# Altium PCB ChassisPowerDistribution_B_2.0_RW.PcbDoc (part 1 of 2)
Units mil, origin at the board's own origin, x right, y up, seen from the top; angles counter-clockwise.
Board outline 15750 x 2250 mil, 4 copper layers (Top Layer, Mid Top Layer, Mid Bottom Layer, Bottom Layer), stack 23.756 mil thick; 164 components, 75 nets, 526 pads, 63 vias.
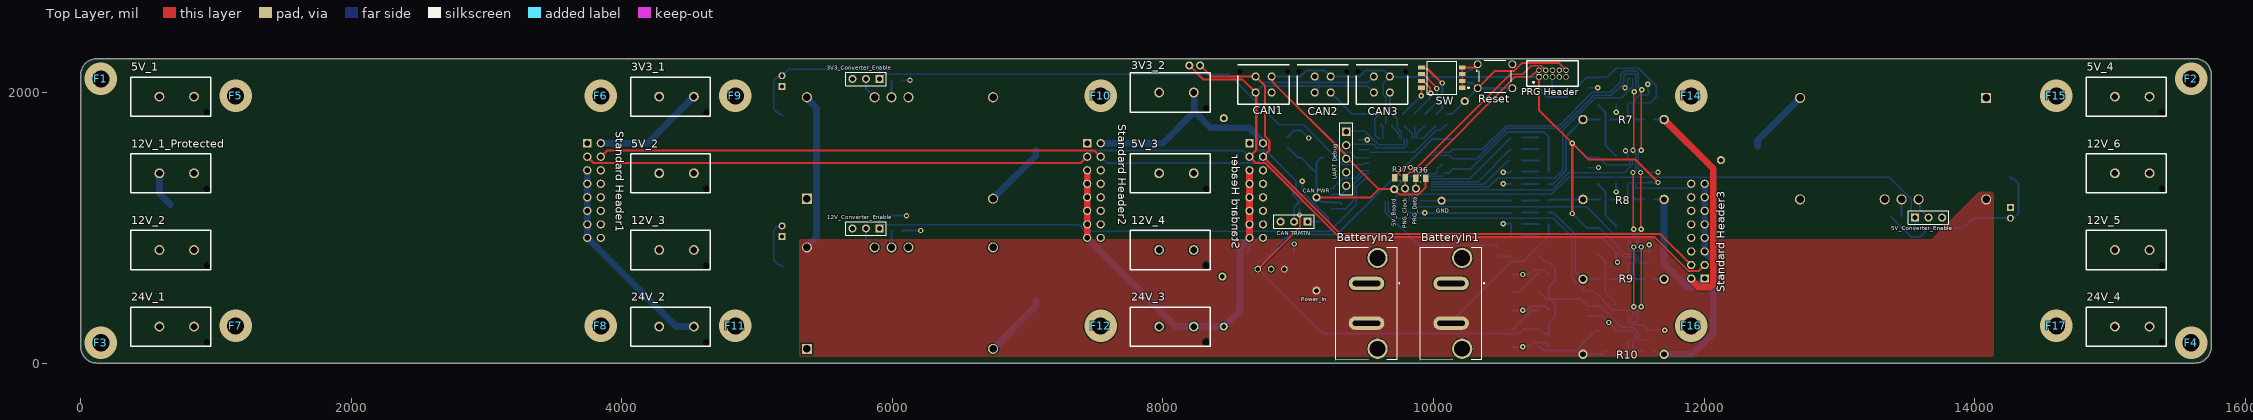
[diagram p0: Top Layer view]
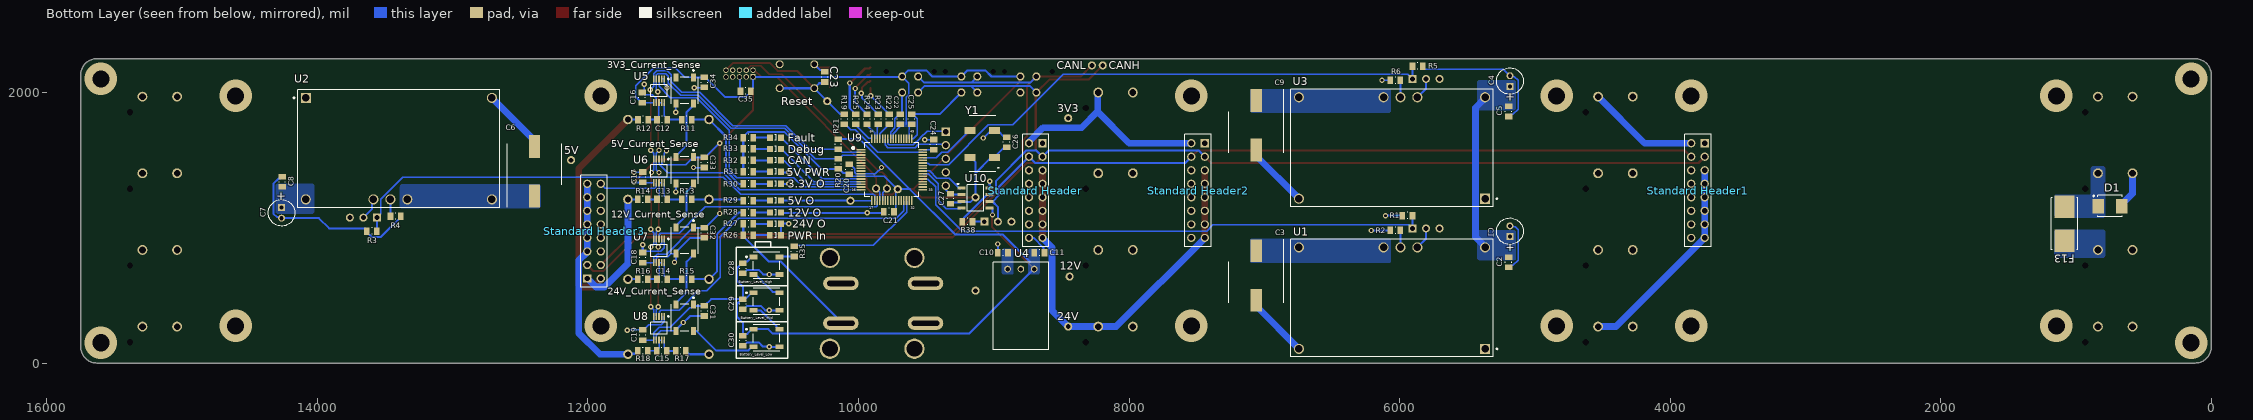
[diagram p1: Bottom Layer view, seen from below]
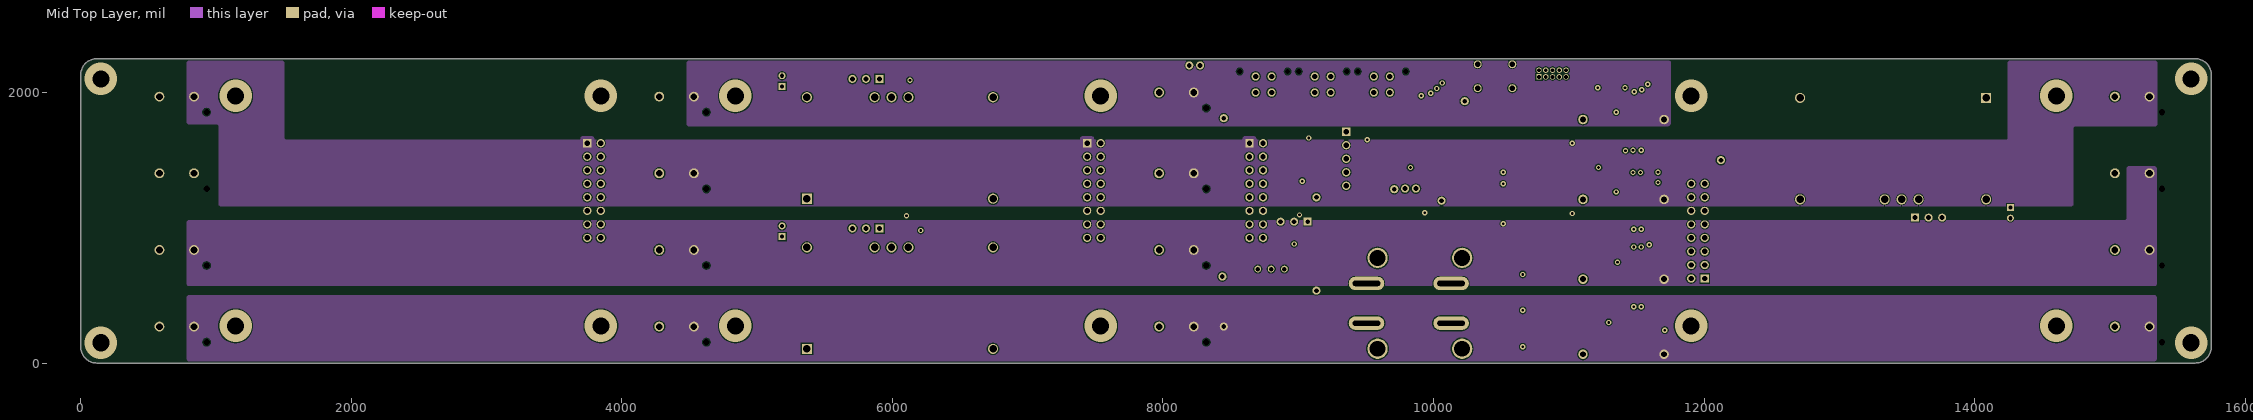
[diagram p2: Mid Top Layer]
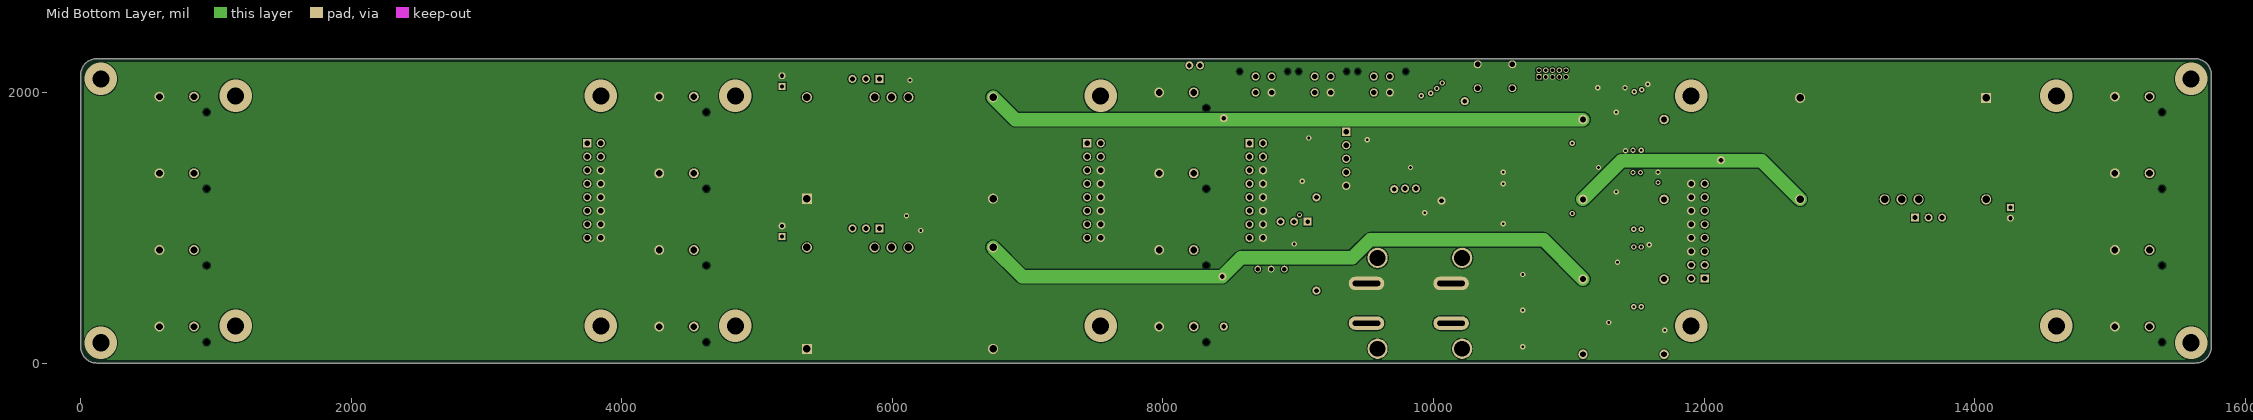
[diagram p3: Mid Bottom Layer]
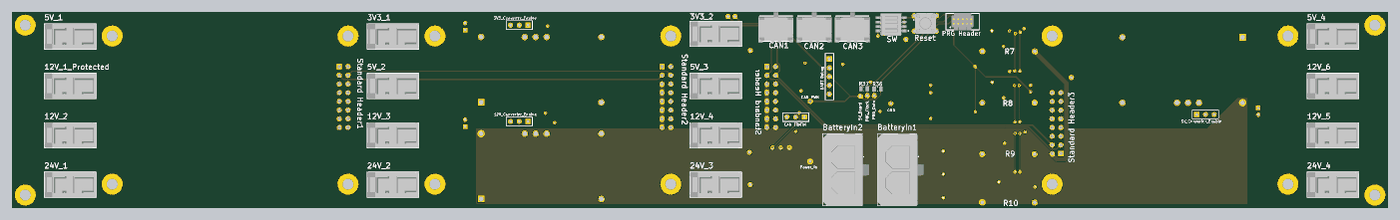
[diagram p5: 3D render of the assembled board from above, using the file's embedded part models]

## Layer stack, top to bottom
Top Solder: solder mask 0.4, Solder Resist, Dk 3.5
Top Layer: signal copper 1.4
Dielectric 2: prepreg 2.8, PP-006, Dk 4.1
Mid Top Layer: signal copper 1.378
Dielectric 1: dielectric 12.6, FR-4, Dk 4.8
Mid Bottom Layer: signal copper 1.378
Dielectric 3: prepreg 2.8, PP-006, Dk 4.1
Bottom Layer: signal copper 1.4
Bottom Solder: solder mask 0.4, Solder Resist, Dk 3.5

## Board outline
120,0 15630,0 ccw(c15630,120) 15750,120 15750,2130 ccw(c15630,2130) 15630,2250 120,2250 ccw(c119.98,2130.02) 0,2130 0,120 ccw(c119.99,119.99)

## Design rules (kind name [scope] priority, off if disabled: settings)
BoardOutlineClearance [All] p1: gap=7.87 ignorepadtopadclearanceinfootprint=FALSE except(15.75: Arc-SplitBarrior Arc-SplitContinuation Track-SplitBarrior Track-SplitContinuation SMDPad-SplitBarrior SMDPad-SplitContinuation THPad-SplitBarrior THPad-SplitContinuation Via-SplitBarrior Via-SplitContinuation Fill-SplitBarrior Fill-SplitContinuation Poly-SplitBarrior Poly-SplitContinuation Region-SplitBarrior Region-SplitContinuation Text-SplitBarrior Text-SplitContinuation)
Clearance "Clearance Bottom Layer" [OnLayer('Bottom Layer')] p1: gap=8 ignorepadtopadclearanceinfootprint=TRUE except(10: Arc-Text Track-Text SMDPad-Text THPad-Text Via-Text Fill-Text Poly-Text Region-Text Text-Text)
Clearance "Clearance Top Layer" [OnLayer('Top Layer')] p2: gap=8 ignorepadtopadclearanceinfootprint=TRUE except(10: Arc-Text Track-Text SMDPad-Text THPad-Text Via-Text Fill-Text Poly-Text Region-Text Text-Text)
Clearance [All] p3: gap=7.87 ignorepadtopadclearanceinfootprint=FALSE except(3.5: Arc-Arc Arc-Track Arc-SMDPad Track-Track Track-SMDPad SMDPad-SMDPad; 5: Arc-Via Track-Via SMDPad-Via THPad-Via Via-Via; 10: Arc-Text Track-Text SMDPad-Text THPad-Text Via-Text Fill-Text Poly-Text Region-Text Text-Text)
HoleSize [All] p1: absolutevalues=TRUE maxlimit=248.03 minlimit=7.87 maxpercent=80.000 minpercent=20.000
MinimumAnnularRing [All] p1: minimumring=3
MinimumSolderMaskSliver [All] p1: minsoldermaskwidth=3.94
PolygonConnect PolygonConnect_1 [All] p1: connectstyle=Direct reliefconductorwidth=20 reliefentries=4 polygonreliefangle="90 Angle" airgapwidth=10
RoutingCorners [All] p1: cornerstyle=Round minsetback=100 maxsetback=100
RoutingVias [All] p1: holewidth=19.68 width=39.37 viastyle="Through Hole" minholewidth=7.87 minwidth=17.72 maxholewidth=39.37 maxwidth=78.74
SilkToSilkClearance [All] p1: silktosilkclearance=3.94
SilkToSolderMaskClearance [IsPad] p1: minsilkscreentomaskgap=3.94 clearancetoexposedcopper=TRUE
SolderMaskExpansion [All] p1: expansion=4 istentingtop=FALSE
Width [All] p1: maxlimit=100 minlimit=3.5 preferedwidth=15
25 further rules are at their usual default settings.

## Classes and differential pairs
component class Microcontroller: C20 C21 C22 C23 C24 C25 C26 F1 F2 F3 F4 GND R19 R20 R21 Reset U9 Y1
component class LEDs: "3.3V O" 3V3_Current_Sense "5V O" "5V PWR" 5V_Current_Sense "12V O" 12V_Current_Sense "24V O" 24V_Current_Sense Battery_Level_High Battery_Level_Low Battery_Level_Mid C28 C29 C30 C31 C32 C33 C34 CAN Debug Fault "PWR In" R26 R27 R28 R29 R30 R31 R32 R33 R34 R35
component class "Current Sensors": C12 C13 C14 C15 C16 C17 C18 C19 R7 R8 R9 R10 R11 R12 R13 R14 R15 R16 R17 R18 U5 U6 U7 U8
component class Converters: 3V3 3V3_Converter_Enable 5V 5V_Board 5V_Converter_Enable 12V 12V_Converter_Enable C1 C2 C3 C4 C5 C6 C7 C8 C9 C10 C11 Power_In R1 R2 R3 R4 R5 R6 U1 U2 U3 U4
component class Connectors: 3V3_1 3V3_2 5V_1 5V_2 5V_3 5V_4 12V_1_Protected 12V_2 12V_3 12V_4 12V_5 12V_6 24V 24V_1 24V_2 24V_3 24V_4 BatteryIn1 BatteryIn2 C35 CAN1 CAN2 CAN3 "CAN TRMTN" CANH CANL D1 F5 F6 F7 F8 F9 F10 F11 F12 F13 F14 F15 F16 F17 PNG_Clock "PRG Header" PRG_Data R36 R37 R38 "Standard Header" "Standard Header1" "Standard Header2" "Standard Header3" "UART Debug"
component class CAN: C27 "CAN PWR" R22 R23 R24 R25 SW U10

## Components (designator, comment, footprint, x,y, rotation, side; value= is the part's Value field where it differs from the comment)
"3.3V O" "Yellow LED" 0805_A 10613.66,1325 r0 bottom
3V3 "Test Point" "Test Point Through-hole" 8425,1790 r90 bottom
3V3_1 "Molex 6.5MM  power connector" "power connector" 4045,2150 r270 top
3V3_2 "Molex 6.5MM  power connector" "power connector" 7740,2180.71 r270 top
3V3_Converter_Enable "Header 3" HDR1X3 5905,2100 r180 top
3V3_Current_Sense "RBG_LED" RGB_LED_1 11285.04,2015 r270 bottom
5V "Test Point" "Test Point Through-hole" 12100,1480 r90 bottom
"5V O" "Yellow LED" 0805_A 10613.66,1201.25 r0 bottom
"5V PWR" "Yellow LED" 0805_A 10613.66,1415 r0 bottom
5V_1 "Molex 6.5MM  power connector" "power connector" 350,2150 r270 top
5V_2 "Molex 6.5MM  power connector" "power connector" 4045,1583.33 r270 top
5V_3 "Molex 6.5MM  power connector" "power connector" 7740,1583.33 r270 top
5V_4 "Molex 6.5MM  power connector" "power connector" 14805,2150 r270 top
5V_Board "Test Point" "Test Point Through-hole" 9735,1265 r90 top
5V_Converter_Enable "Header 3" HDR1X3 13560,1075 r0 top
5V_Current_Sense "RBG_LED" RGB_LED_1 11285.04,1425 r270 bottom
12V "Test Point" "Test Point Through-hole" 8414.3,619.5 r90 bottom
"12V O" "Yellow LED" 0805_A 10613.66,1112.5 r0 bottom
12V_1_Protected "Molex 6.5MM  power connector" "power connector" 350,1583.33 r270 top
12V_2 "Molex 6.5MM  power connector" "power connector" 350,1016.67 r270 top
12V_3 "Molex 6.5MM  power connector" "power connector" 4045,1016.67 r270 top
12V_4 "Molex 6.5MM  power connector" "power connector" 7740,1016.67 r270 top
12V_5 "Molex 6.5MM  power connector" "power connector" 14805,1016.67 r270 top
12V_6 "Molex 6.5MM  power connector" "power connector" 14805,1583.33 r270 top
12V_Converter_Enable "Header 3" HDR1X3 5905,995 r180 top
12V_Current_Sense "RBG_LED" RGB_LED_1 11285.04,905 r270 bottom
24V "Test Point" "Test Point Through-hole" 8470,245 r180 bottom
"24V O" "Yellow LED" 0805_A 10613.66,1028.75 r0 bottom
24V_1 "Molex 6.5MM  power connector" "power connector" 350,450 r270 top
24V_2 "Molex 6.5MM  power connector" "power connector" 4045,450 r270 top
24V_3 "Molex 6.5MM  power connector" "power connector" 7740,450 r270 top
24V_4 "Molex 6.5MM  power connector" "power connector" 14805,450 r270 top
24V_Current_Sense "RBG_LED" RGB_LED_1 11285,335 r270 bottom
Battery_Level_High "RBG_LED" RGB_LED_1 10680,720 r180 bottom
Battery_Level_Low "RBG_LED" RGB_LED_1 10680,185 r180 bottom
Battery_Level_Mid "RBG_LED" RGB_LED_1 10680,455 r180 bottom
BatteryIn1 "Super Saber" "Super Sabre" 10329.71,35 r90 top
BatteryIn2 "Super Saber" "Super Sabre" 9704.71,35 r90 top
C1 "ECA1HM100" CAPPR55-200-1100X500X1200 5185,974.37 r90 bottom
C2 "Capacitor 0805" "Cap 0805" 5195,745 r90 bottom
C3 "Motor Capacitor SMD" CAP_SMD_CAN 7060,646.93 r270 bottom value="330 uF"
C4 "ECA1HM100" CAPPR55-200-1100X500X1200 5185,2084.37 r90 bottom
C5 "Capacitor 0805" "Cap 0805" 5195,1860 r90 bottom
C6 "Motor Capacitor SMD" CAP_SMD_CAN 12395,1418.07 r90 bottom value="330 uF"
C7 "ECA1HM100" CAPPR55-200-1100X500X1200 14265,1110.63 r270 bottom
C8 "Capacitor 0805" "Cap 0805" 14260,1340 r270 bottom
C9 "Motor Capacitor SMD" CAP_SMD_CAN 7060,1756.93 r270 bottom value="330 uF"
C10 "Capacitor 0805" "Cap 0805" 8932.6,815 r180 bottom
C11 "Capacitor 0805" "Cap 0805" 8662.4,815 r0 bottom
C12 "0805 Capacitor" "Cap 0805" 11452.6,1800 r0 bottom value=0.1µF
C13 "0805 Capacitor" "Cap 0805" 11452.6,1210 r0 bottom value=0.1µF
C14 "0805 Capacitor" "Cap 0805" 11452.6,620 r0 bottom value=0.1µF
C15 "0805 Capacitor" "Cap 0805" 11455,90 r0 bottom value=0.1µF
C16 "Capacitor 0805" "Cap 0805" 11600,1962.4 r270 bottom
C17 "Capacitor 0805" "Cap 0805" 11595,1375 r270 bottom
C18 "Capacitor 0805" "Cap 0805" 11595,780 r270 bottom
C19 "Capacitor 0805" "Cap 0805" 11595,207.4 r270 bottom
C20 "Capacitor 0805" "Cap 0805" 10070,1432.4 r90 bottom
C21 "Capacitor 0805" "Cap 0805" 9775,1120 r0 bottom
C22 "Capacitor 0805" "Cap 0805" 9690,1802.4 r90 bottom
C23 "0805 Capacitor" "Cap 0805" 10250,2115 r270 bottom value=0.1µF
C24 "Capacitor 0805" "Cap 0805" 9445,1615 r90 bottom
C25 "Capacitor 0805" "Cap 0805" 9607.5,1802.4 r90 bottom
C26 "Capacitor 0805" "Cap 0805" 8905,1632.4 r270 bottom
C27 "Capacitor 0805" "Cap 0805" 9320,1215 r90 bottom
C28 "0805 Capacitor" "Cap 0805" 10855,700 r270 bottom value=0.1µF
C29 "0805 Capacitor" "Cap 0805" 10855,435 r270 bottom value=0.1µF
C30 "0805 Capacitor" "Cap 0805" 10855,165 r270 bottom value=0.1µF
C31 "0805 Capacitor" "Cap 0805" 11140,385 r270 bottom value=0.1µF
C32 "0805 Capacitor" "Cap 0805" 11140,962.6 r270 bottom value=0.1µF
C33 "0805 Capacitor" "Cap 0805" 11140,1482.6 r270 bottom value=0.1µF
C34 "0805 Capacitor" "Cap 0805" 11140,2075 r270 bottom value=0.1µF
C35 "Capacitor 0805" "Cap 0805" 10835,2010 r180 bottom
CAN "Blue LED" 0805_A 10613.66,1498.75 r0 bottom
CAN1 "Molex Micro" "microfit 4 pin" 8744.06,2059.06 r180 top
CAN2 "Molex Micro" "microfit 4 pin" 9181.16,2059.06 r180 top
CAN3 "Molex Micro" "microfit 4 pin" 9618.27,2059.06 r180 top
"CAN PWR" "Test Point" "Test Point Through-hole" 9160,1205 r90 top
"CAN TRMTN" "Header 3" HDR1X3 9070,1045 r180 top
CANH "Test Point" "Test Point Through-hole" 8170,2180 r90 bottom
CANL "Test Point" "Test Point Through-hole" 8250,2180 r90 bottom
D1 "1SMB5928BT3G" ONSC-SMB-2-403A-03_H_V 750,1160 r180 bottom
Debug "Green LED" 0805_A 10613.66,1582.5 r0 bottom
F1 "Screw Hole" "Screw Hole" 150,2100 r0 top locked
F2 "Screw Hole" "Screw Hole" 15600,2100 r0 top locked
F3 "Screw Hole" "Screw Hole" 150,150 r0 top locked
F4 "Screw Hole" "Screw Hole" 15600,150 r0 top locked
F5 "Screw Hole" "Screw Hole" 1145,1975 r0 top locked
F6 "Screw Hole" "Screw Hole" 3845,1975 r0 top locked
F7 "Screw Hole" "Screw Hole" 1145,275 r0 top locked
F8 "Screw Hole" "Screw Hole" 3845,275 r0 top locked
F9 "Screw Hole" "Screw Hole" 4840,1975 r0 top locked
F10 "Screw Hole" "Screw Hole" 7540,1975 r0 top locked
F11 "Screw Hole" "Screw Hole" 4840,275 r0 top locked
F12 "Screw Hole" "Screw Hole" 7540,275 r0 top locked
F13 "015402.5DRT" FP-0154-MFG 1085,1030 r90 bottom
F14 "Screw Hole" "Screw Hole" 11905,1975 r0 top
F15 "Screw Hole" "Screw Hole" 14605,1975 r0 top
F16 "Screw Hole" "Screw Hole" 11905,275 r0 top
F17 "Screw Hole" "Screw Hole" 14605,275 r0 top
Fault "Red LED" 0805_A 10613.66,1666.25 r0 bottom
GND "Test Point" "Test Point Through-hole" 10085,1180 r90 top
PNG_Clock "Test Point" "Test Point Through-hole" 9815,1270 r90 top
Power_In "Test Point" "Test Point Through-hole" 9160,515 r90 top
"PRG Header" "Programming Header" programming3D 10684.72,2023.23 r0 top
PRG_Data "Test Point" "Test Point Through-hole" 9895,1270 r90 top
"PWR In" "Yellow LED" 0805_A 10615,945 r0 bottom
R1 "Resistor 0805" RESC0805(2012)_N 5942.4,1090 r180 bottom value="4.7 kOhm"
R2 "Resistor 0805" RESC0805(2012)_N 6032.4,980 r0 bottom value="732 Ohm"
R3 "Resistor 0805" RESC0805(2012)_N 13597.4,975 r180 bottom value="4.7 kOhm"
R4 "Resistor 0805" RESC0805(2012)_N 13422.6,1085 r180 bottom value="21 kOhm"
R5 "Resistor 0805" RESC0805(2012)_N 5867.6,2195 r0 bottom value="4.7 kOhm"
R6 "Resistor 0805" RESC0805(2012)_N 6032.4,2090 r0 bottom value="78.7 kOhm"
R7 "Current Sensing resistor" "Shunt Resistor" 11105,1800 r0 top value="2.5 mOhm"
R8 "Current Sensing resistor" "Shunt Resistor" 11105,1210 r0 top value="2.5 mOhm"
R9 "Current Sensing resistor" "Shunt Resistor" 11105,620 r0 top value="2.5 mOhm"
R10 "Current Sensing resistor" "Shunt Resistor" 11105,65 r0 top value="2.5 mOhm"
R11 "Resistor 0805" RESC0805(2012)_N 11270,1800 r180 bottom value="10 Ohm"
R12 "Resistor 0805" RESC0805(2012)_N 11592.6,1800 r0 bottom value="10 Ohm"
R13 "Resistor 0805" RESC0805(2012)_N 11270,1210 r180 bottom value="10 Ohm"
R14 "Resistor 0805" RESC0805(2012)_N 11595,1210 r0 bottom value="10 Ohm"
R15 "Resistor 0805" RESC0805(2012)_N 11270,620 r180 bottom value="10 Ohm"
R16 "Resistor 0805" RESC0805(2012)_N 11595,620 r0 bottom value="10 Ohm"
R17 "Resistor 0805" RESC0805(2012)_N 11315,90 r180 bottom value="10 Ohm"
R18 "Resistor 0805" RESC0805(2012)_N 11595,90 r0 bottom value="10 Ohm"
R19 "Resistor 0805" RESC0805(2012)_N 10105,1802.6 r270 bottom value="100 Ohm"
R20 "Resistor 0805" RESC0805(2012)_N 10150,1472.6 r270 bottom value="4.7 kOhm"
R21 "Resistor 0805" RESC0805(2012)_N 10150,1617.4 r270 bottom value="4.7 kOhm"
R22 "Resistor 0805" RESC0805(2012)_N 9772.5,1802.4 r270 bottom value=120R
R23 "Resistor 0805" RESC0805(2012)_N 9855,1802.4 r270 bottom value=120R
R24 "Resistor 0805" RESC0805(2012)_N 9937.5,1802.4 r270 bottom value=120R
R25 "Resistor 0805" RESC0805(2012)_N 10020,1802.4 r270 bottom value=120R
R26 "Resistor 0805" RESC0805(2012)_N 10814.72,945 r0 bottom value="1.6 kOhm"
R27 "Resistor 0805" RESC0805(2012)_N 10814.72,1028.75 r180 bottom value="1.6 kOhm"
R28 "Resistor 0805" RESC0805(2012)_N 10814.72,1112.5 r0 bottom value="820 Ohm"
R29 "Resistor 0805" RESC0805(2012)_N 10814.72,1201.25 r180 bottom value="330 Ohm"
R30 "Resistor 0805" RESC0805(2012)_N 10814.72,1325 r180 bottom value="120 Ohm"
R31 "Resistor 0805" RESC0805(2012)_N 10814.72,1415 r180 bottom value="330 Ohm"
R32 "Resistor 0805" RESC0805(2012)_N 10814.72,1498.75 r0 bottom value="200 Ohm"
R33 "Resistor 0805" RESC0805(2012)_N 10814.72,1582.5 r0 bottom value="330 Ohm"
R34 "Resistor 0805" RESC0805(2012)_N 10814.72,1666.25 r0 bottom value="330 Ohm"
R35 "Resistor 0805" RESC0805(2012)_N 10475,825 r270 bottom value="470 Ohm"
R36 "Resistor 0805" RESC0805(2012)_N 9905,1365 r0 top value="47 kOhm"
R37 "Resistor 0805" RESC0805(2012)_N 9752.6,1370 r0 top value="47 kOhm"
R38 "Resistor 0805" RESC0805(2012)_N 9195,1045 r0 bottom value=120R
Reset "Test Point" "Test Point Through-hole" 10206.34,1915.71 r90 bottom
Reset "1825910-7" "Switch 6mm 24V (NO)" 10455,2120 r0 top
"Standard Header" "Stacking Header" SMTC-SSQ-108-02-X-D 8640,1625 r270 bottom
"Standard Header1" "Stacking Header" SMTC-SSQ-108-02-X-D 3745,1625 r270 bottom locked
"Standard Header2" "Stacking Header" SMTC-SSQ-108-02-X-D 7440,1625 r270 bottom locked
"Standard Header3" "Stacking Header" SMTC-SSQ-108-02-X-D 12005,625 r90 bottom
SW "TDA04H0SB1" CKCP-TDA04H0SB1R_V 10062.28,2110 r180 top
U1 "PTN78020WAH" EUK0007A 6056.26,480 r0 bottom
U2 "PTN78020WAH" EUK0007A 13397.99,1584.8 r180 bottom
U3 "PTN78020WAH" EUK0007A 6056.26,1590 r0 bottom
U4 "OKI-78SR-5_1.5-W36H-C" OKI-78SR-HORIZONTAL 8800,421.38 r0 bottom
U5 "INA226AIDGST" DGS0010A_N 11474.69,2012.6 r270 bottom
U6 "INA226AIDGST" DGS0010A_N 11474.68,1420 r270 bottom
U7 "INA226AIDGST" DGS0010A_N 11474.68,830 r270 bottom
U8 "INA226AIDGST" DGS0010A_N 11474.69,257.6 r270 bottom
U9 "CY8C4248AZI-L485" TQFP50P1200X1200X160-64N 9753.38,1429.53 r180 bottom
U10 "MCP2562-E/SN" SOIC127P600X175-8N 9135,1220 r180 bottom
"UART Debug" "UART Debuging Header" "UART Debugging Header" 9305,1780 r270 top
Y1 "40k Hz" SG-636_3D 9084.45,1620 r90 bottom

## Footprints (in the part's own frame and the unit in brackets; to place one, negate y for a bottom-side part, rotate by r counter-clockwise, add the part's x,y. Pads: shape width x height; smd on the part's side, far side on the other; paste and mask are expansions set on the pad)
0805_A [mm] "Chip LED, 2-Leads, Body 2.0x1.3mm, IPC Medium Density"
  rect 1.1x1.2 smd: 1(-1.05,0) 2(1.05,0)
  silkscreen extent -0.15,-0.5 0.15,0.5, body extent -1,-0.63 1,0.63, height 0.68
"Cap 0805" [mm]
  rect 1.05x1.4 smd: 1(-0.95,0) 2(0.95,0)
  silkscreen extent -0.05,-0.6 0.05,0.6, body extent -1.1,-0.67 1.1,0.68, height 0.7
CAP_SMD_CAN [mm]
  rect 4.3x2.1 smd: 1(-4.65,0) 2(4.65,0)
  silkscreen extent -6.8,-5.15 5.15,5.15, body extent -6.79,-5.21 5.21,5.29, height 10.5
CAPPR55-200-1100X500X1200 [mm] "THD, 2-Leads, Dia 5mm, Body Length 11mm"
  rect 1.3x1.3 hole 0.8: 1(-1,0)
  round 1.3 hole 0.8: 2(1,0)
  silkscreen extent -2.5,-2.5 2.5,2.5, body extent -2.5,-2.5 2.5,2.5, height 12
CKCP-TDA04H0SB1R_V [mm] "SMD, 8-Leads, Body 6.21x6.2mm, Pitch 1.27mm"
  rect 1.27x0.76 smd: 1(-3.81,1.905) 2(-3.81,0.635) 3(-3.81,-0.635) 4(-3.81,-1.905) 5(3.81,-1.905) 6(3.81,-0.635) 7(3.81,0.635) 8(3.81,1.905)
  silkscreen extent -5.12,-3.11 2.78,3.11, body extent -4.06,-3.1 4.06,3.11, height 2.3
DGS0010A_N [mm] "SOP, 10-Leads, Body 3.1x3.1mm, Pitch 0.5mm, IPC Medium Density"
  rrect33% 1.35x0.3 smd: 1(-2.225,1) 2(-2.225,0.5) 3(-2.225,0) 4(-2.225,-0.5) 5(-2.225,-1) 6(2.225,-1) 7(2.225,-0.5) 8(2.225,0) 9(2.225,0.5) 10(2.225,1)
  silkscreen extent -2.35,-1.55 1.15,1.87, body extent -2.45,-1.5 2.45,1.5, height 0.94
EUK0007A [mm] "Module, 7-Leads, Body 37.97x22.1mm"
  rect 1.9x1.9 hole 1.4: 1(-17.465,9.53)
  round 1.9 hole 1.4: 2(-17.465,-9.52) 3(-4.765,-9.52) 4(-1.585,-9.52) 5(1.595,-9.52) 6(17.475,-9.52) 7(17.475,9.53)
  silkscreen extent -19.81,-11.05 18.98,11.05, body extent -18.98,-11.05 18.98,11.05, height 9
FP-0154-MFG [mil]
  rect 167x150 smd paste+0 mask+0: 1(-125.5,0) 2(125.5,0)
  silkscreen extent -192,-99 192,99, body extent -192,-99 192,99, height 150
HDR1X3 [mm] "Connector; Header; 3 Position"
  rect 1.5x1.5 hole 0.9: 1(0,0)
  round 1.5 hole 0.9: 2(2.54,0) 3(5.08,0)
  silkscreen extent -1.27,-1.27 6.35,1.27
"microfit 4 pin" [mil] "Molex micro-fit 3.0 4 pos"
  round 60 hole 40: 1(-59.06,59.06) 2(-59.06,-59.06) 3(59.06,59.06) 4(59.06,-59.06)
  round 0 hole 40 unplated: 7(177.17,-96.06) ""(-177.17,-96.06)
  silkscreen extent -190,-145 190,145, body extent -200,-187 200,159, height 391
OKI-78SR-HORIZONTAL [mm]
  round 1.252 hole 0.835: 1(2.5,-6.95) 2(0,-6.95) 3(-2.5,-6.95)
  silkscreen extent -5.2,-8.25 5.2,8.25, body extent -5.21,-8.76 5.21,10.29, height 9.26
ONSC-SMB-2-403A-03_H_V [mil] "Molded, 2-Leads, Body 4.6x3.95mm"
  rect 85x107.99 smd: 1(-87.01,0) 2(87.01,0)
  silkscreen extent -125,-79 91,81, body extent -91,-78 91,78, height 95
"power connector" [mm]
  round 1.85 hole 1.25: 1(4.59,5.898) 2(4.59,12.398)
  round 0 hole 1.2 unplated: 9(7.51,14.748)
  silkscreen extent 0.92,0.5 8.26,15.5, body extent 0.91,0.5 8.25,15.5, height 16.01
programming3D [mil]
  rect 40x40 hole 28 mask+3: 1(95.28,91.77)
  round 40 hole 28 mask+3: 2(95.28,141.77) 3(145.28,91.77) 4(145.28,141.77) 5(195.28,91.77) 6(195.28,141.77) 7(245.28,91.77) 8(245.28,141.77) 9(295.28,91.77) 10(295.28,141.77)
  silkscreen extent 5,22 385,211, body extent 70,19 320,219, height 226
RESC0805(2012)_N [mm] "Chip Resistor, Body 2.0x1.3mm, IPC Medium Density"
  rect 1.05x1.4 smd: 1(-0.95,0) 2(0.95,0)
  silkscreen extent -0.05,-0.6 0.05,0.6, body extent -1.1,-0.67 1.1,0.68, height 0.7
RGB_LED_1 [mm]
  rect 1.5x0.9 smd: 1(-2.45,1.65) 2(-2.45,-1.65) 3(2.45,-1.65) 4(2.45,1.65)
  silkscreen extent -3.87,-2.5 2.5,2.5, body extent -2.7,-2.5 2.7,2.5, height 1.69
"Screw Hole" [mil]
SG-636_3D [mm]
  rect 1.3x2.1 smd: 1(-2.54,-2.3) 2(2.54,-2.3) 3(2.54,2.3) 4(-2.54,2.3)
  silkscreen extent -5.25,-3.1 5.25,2.5, body extent -5.25,-3.22 5.25,3.22, height 2.8
"Shunt Resistor" [mil]
  round 70 hole 44: 1(0,0) 2(600,0)
SMTC-SSQ-108-02-X-D [mm] "SQ Post Socket, 2x8 Pins, Vertical, 2.54mm Pitch, Female"
  rect 1.55x1.55 hole 1.02: 1(0,0)
  round 1.55 hole 1.02: 2(0,-2.54) 3(2.54,0) 4(2.54,-2.54) 5(5.08,0) 6(5.08,-2.54) 7(7.62,0) 8(7.62,-2.54) 9(10.16,0) 10(10.16,-2.54) 11(12.7,0) 12(12.7,-2.54) 13(15.24,0) 14(15.24,-2.54) 15(17.78,0) 16(17.78,-2.54)
  silkscreen extent -1.65,-3.74 19.43,1.2, body extent -1.52,-3.75 19.3,1.21, height 8.51
SOIC127P600X175-8N [mm]
  rect 1.5x0.6 smd: 1(-2.65,1.905) 2(-2.65,0.635) 3(-2.65,-0.635) 4(-2.65,-1.905) 5(2.65,-1.905) 6(2.65,-0.635) 7(2.65,0.635) 8(2.65,1.905)
  silkscreen extent -3.44,-2.45 1.58,2.81, body extent -3.12,-2.45 3.13,2.45, height 1.76
"Super Sabre" [mil]
  oval 99x263 hole 203 slot 39 at 0 deg: 1(553.55,199.71) 2(259.55,199.71)
  round 150 hole 118: ""(70.55,117.71) ""(742.55,117.71)
  silkscreen extent -9,-48 822,427, body extent -12,-105 818,422, height 586
"Switch 6mm 24V (NO)" [mm]
  round 1.498 hole 0.99: 1a(-3.25,2.25) 1b(3.25,2.25) 2a(-3.25,-2.25) 2b(3.25,-2.25)
  silkscreen extent -3.53,-3 3,3, body extent -3.9,-2.99 3.9,3, height 5.01
"Test Point Through-hole" [mil]
  round 60 hole 35: 1(20,25)
TQFP50P1200X1200X160-64N [mm]
  rect 1.65x0.3 smd mask+0: 1(-5.801,3.75) 2(-5.801,3.25) 3(-5.801,2.75) 4(-5.801,2.25) 5(-5.801,1.75) 6(-5.801,1.25) 7(-5.801,0.75) 8(-5.801,0.25) 9(-5.801,-0.25) 10(-5.801,-0.75) 11(-5.801,-1.25) 12(-5.801,-1.75) 13(-5.801,-2.25) 14(-5.801,-2.75) 15(-5.801,-3.25) 16(-5.801,-3.75) 33(5.801,-3.75) 34(5.801,-3.25) 35(5.801,-2.75) 36(5.801,-2.25) 37(5.801,-1.75) 38(5.801,-1.25) 39(5.801,-0.75) 40(5.801,-0.25) 41(5.801,0.25) 42(5.801,0.75) 43(5.801,1.25) 44(5.801,1.75) 45(5.801,2.25) 46(5.801,2.75) 47(5.801,3.25) 48(5.801,3.75)
  rect 0.3x1.65 smd mask+0: 17(-3.75,-5.801) 18(-3.25,-5.801) 19(-2.75,-5.801) 20(-2.25,-5.801) 21(-1.75,-5.801) 22(-1.25,-5.801) 23(-0.75,-5.801) 24(-0.25,-5.801) 25(0.25,-5.801) 26(0.75,-5.801) 27(1.25,-5.801) 28(1.75,-5.801) 29(2.25,-5.801) 30(2.75,-5.801) 31(3.25,-5.801) 32(3.75,-5.801) 49(3.75,5.801) 50(3.25,5.801) 51(2.75,5.801) 52(2.25,5.801) 53(1.75,5.801) 54(1.25,5.801) 55(0.75,5.801) 56(0.25,5.801) 57(-0.25,5.801) 58(-0.75,5.801) 59(-1.25,5.801) 60(-1.75,5.801) 61(-2.25,5.801) 62(-2.75,5.801) 63(-3.25,5.801) 64(-3.75,5.801)
  silkscreen extent -7.49,-5.05 5.05,5.05, body extent -5.12,-5.12 5.12,5.12, height 1.6
"UART Debugging Header" [mm]
  rect 1.55x1.55 hole 1.02: 1(1.778,1.27)
  round 1.55 hole 1.02: 2(4.318,1.27) 3(6.858,1.27) 4(9.398,1.27) 5(11.938,1.27)
  silkscreen extent 0.13,0.07 13.59,2.54

## Part data
"3.3V O" "5V O" "5V PWR" "12V O" "24V O" "PWR In": library part LED, "Standard 0805 LED", Color=Yellow, PackageReference=0805_A
3V3_Converter_Enable 5V_Converter_Enable 12V_Converter_Enable "CAN TRMTN": "Header, 3-Pin", LatestRevisionDate=17-Jul-2002, LatestRevisionNote="Re-released for DXP Platform.", Publisher="Altium Limited"
3V3_Current_Sense 5V_Current_Sense 12V_Current_Sense 24V_Current_Sense Battery_Level_High Battery_Level_Low Battery_Level_Mid: library part CMP-003-0014-1, "LED ADAI-WS2812B-4", Component Type=Standard, ComponentLink1Description=Digi-Key_Purchase_URL, ComponentLink1URL=https://www.digikey.com/en/products/detail/broadcom-limited/ASMB-MTB1-0A3A2/5695366, ComponentLink2Description=Datasheet_Link, ComponentLink2URL=https://docs.broadcom.com/docs/AV02-4194EN, Design Item ID=RBG_LED, Digi-Key_Part_Number=516-3280-1-ND, Pin Count=4, Source=LED_RGB.SchLib
24V: library part CMP-012-0000-1, Component Type=Standard, Design Item ID="Test Point", Pin Count=1, Source="Test Points.SchLib"
C1 C4 C7: library part CMP-2100-03622-1, "Aluminum Electrolytic Capacitor, 10 uF, +/- 20%, 50 V, -40 to 85 degC, 2-Pin THD, RoHS, Bulk", Capacitance=10uF, Case/Package=Radial, Dielectric Material=Aluminium, Leakage Current=3uA, Manufacturer=Panasonic, Max Operating Temperature=85degC, Min Operating Temperature=-40degC, Package Description="2-Pin Radial Lead, Dia 5 mm, Height 12 mm", Package Quantity=200, Package Reference=CAPPR55-200-1100X500X1200, Ripple Current=65mA, Tolerance=20%, Voltage=50V, Datasheet URL=https://industrial.panasonic.com/cdbs/www-data/pdf/RDF0000/ABA0000C1218.pdf, Datasheet Version="Rev. 05, 10/2016", Diameter=5mm, Dissipation Factor=0.12%, Height=11mm, Height - Seated (Max)=0.472inch, Lead Diameter=0.5mm, Lead Free=LeadFree, Lead Pitch=2mm, Lead/Base Style=Straight, Length=11mm, Life (Hours)=2000Hour, Manufacturer URL=http://www.panasonic.com/, Mount=ThroughHole, Number of Pins=2, Packaging=Bulk, Radiation Hardening=No, REACH SVHC=NoSVHC, Ripple Current (AC)=65mA, RoHSCompliant=true, Termination=Radial, Voltage Rating=50V, Voltage Rating (DC)=50V
C2 C5 C8: "Standard Capacitor", Capacitance="2.2 µF", Case Size/Dimension=0805, Mounting Technology=SurfaceMount, Package Reference=0805
C3 C6 C9: "Capacitor Polarised", ComponentLink1Description=Digi-Key_Purchase_URL, ComponentLink1URL=https://www.digikey.com/en/products/detail/panasonic-electronic-components/EEE-FK1V331AP/1142089, ComponentLink2Description=Datasheet_Link, ComponentLink2URL=http://industrial.panasonic.com/www-cgi/jvcr13pz.cgi?E+PZ+3+ABA0088+EEEFK1V331AP+7+WW, Digi-Key_Part_Number=PCE4429CT-ND
C10: "Standard Capacitor", Capacitance="22 µF", Case Size/Dimension=0805, Mounting Technology=SurfaceMount, Package Reference=0805
C11 C21 C25: "Standard Capacitor", Capacitance="10 µF", Case Size/Dimension=0805, Mounting Technology=SurfaceMount, Package Reference=0805
C12 C13 C14 C15 C23 C28 C29 C30 C31 C32 C33 C34: library part CMP-002-0000-1, "Standard Capacitor", Case Size/Dimension=0805, Package Description="2-Pin Surface Mount Device, Body 2.01 x 1.25 mm", Tolerance (%)=±10%, Component Type=Standard, ComponentLink1Description=Digi-Key_Purchase_URL, ComponentLink1URL=https://www.digikey.com/product-detail/en/kemet/C0805C104Z5VACTU/399-1177-1-ND/411452, ComponentLink2Description="Datasheet Link", ComponentLink2URL=https://content.kemet.com/datasheets/KEM_C1005_Y5V_SMD.pdf, Design Item ID="0805 Capacitor", Digi-Key_Part_Number=399-1177-1-ND, Digikey URL=https://www.digikey.com/product-detail/en/kemet/C0805C104Z5VACTU/399-1177-1-ND/411452, Mounting Technology=SurfaceMount, Package Reference=0805, Pin Count=2, Source="Standard Cap.SchLib"
C16 C17 C18 C19 C20 C22 C26 C27 C35: "Standard Capacitor", Capacitance=0.1µF, Case Size/Dimension=0805, Dielectric=X5R, Manufacturer=AVX, Package Description="2-Pin Surface Mount Device, Body 2.01 x 1.25 mm", Rated Voltage=10V, Tolerance (%)=±10%, Datasheet URL=http://datasheets.avx.com/cx5r.pdf, Datasheet Version=05/2016, Manufacturer URL=http://www.avx.com/, Mounting Technology=SurfaceMount, Package Reference=0805
C24: "Standard Capacitor", Capacitance="1 µF", Case Size/Dimension=0805, Mounting Technology=SurfaceMount, Package Reference=0805
CAN: library part LED, "Standard 0805 LED", Color=Blue, PackageReference=0805_A
CAN1 CAN2 CAN3: library part "Molex micro-fit 4-pin (Single row schematic)", "Molex micro-fit 3.0 dual row header. P/N 0430450427"
D1: library part CMP-1060-00153-1, "3 W Zener Voltage Regulator, 2-Pin SMB, Pb-Free, Tape and Reel", Manufacturer="On Semiconductor", ComponentLink1Description="Manufacturer URL", ComponentLink1URL=http://www.onsemi.com/, ComponentLink2Description=Datasheet, ComponentLink2URL=http://www.onsemi.com/pub_link/Collateral/1SMB5913BT3-D.PDF, ComponentLink3Description="Package Specification", ComponentLink3URL=http://www.onsemi.com/pub_link/Collateral/1SMB5913BT3-D.PDF, DatasheetVersion="Rev. 8", Mounting Technology="Surface Mount", PackageDescription="2-Pin Small Molded Package, J-Bend Lead, Body 4.33 x 3.625 mm", PackageReference=SMB-2-403A-03_H, PackageVersion="Rev. H, 05/2011", Packing="Tape and Reel", PartNumber=1SMB5928BT3G, RoHS=Pb-Free, VZ Typ (V)=13
Debug: library part LED, "Standard 0805 LED", Color=Green, PackageReference=0805_A
F1 F2 F3 F4 F5 F6 F7 F8 F9 F10 F11 F12 F14 F15 F16 F17: "Add 4 of these to your design for screw hole mounting"
F13: library part CMP-2000-05609-2, "FUSE BRD MNT 2.5A 125VAC/VDC SMD", Fuse Current=2.5A, Manufacturer=Littelfuse, Max Fuse Ac Voltage=125V, Package=0154, Temperature="-55°C to +125°C", Temperature Range High=+125°C, Temperature Range Low=-55°C, Automotive=No, Category=Fuse, ComponentLink2Description=Datasheet, ComponentLink2URL=https://www.littelfuse.com/~/media/electronics/datasheets/fuses/littelfuse_fuse_154_154t_154l_154tl_datasheet.pdf.pdf, Device Class L1="Circuit Protection", Device Class L2=Fuses, Device Class L3=unset, Digikey Description="FUSE BRD MNT 2.5A 125VAC/VDC SMD", Fuse Blow Speed=Slow, Height=3.81mm, Lead Free=Yes, Manufacturer Part Number=015402.5DRT, Max Fuse Dc Voltage=125V, Mouser Description="Fuse Chip Slow Blow Acting 2.5A SMD Solder Pad 9.73 X 5.03 X 3.81mm T/R CSA/PSE/UL", Octopart=https://octopart.com/015402.5drt-littelfuse-565920, RoHS=TRUE
Fault: library part LED, "Standard 0805 LED", Color="Super Red", Manufacturer="Wuerth Elektronik", PartNumber=150080SS75000, ComponentLink1Description="Manufacturer URL", ComponentLink1URL=http://www.we-online.com, ComponentLink2Description=Datasheet, ComponentLink2URL=http://katalog.we-online.com/led/datasheet/150080SS75000.pdf, PackageReference=0805_A
R1 R3 R5 R19 R37: library part CMP-006-0001-1, "Generic 0805 Resistor", Case-EIA=0805, Case-Metric=2012, Power="0.125 W", Tolerance="5 %", Component Type=Standard, ComponentLink1Description=Digi-Key_Purchase_Link, ComponentLink1URL=https://www.digikey.com/product-detail/en/rohm-semiconductor/ESR10EZPJ121/RHM120KCT-ND/1762959, ComponentLink2Description="Datasheet Link", ComponentLink2URL=https://d1d2qsbl8m0m72.cloudfront.net/en/products/databook/datasheet/passive/resistor/chip_resistor/esr-e.pdf, Design Item ID="Resistor 0805", Digi-Key_Part_Number=RHM120KCT-ND, Pin Count=2, Source="CAN Termination Resistor 0805.SchLib", Technology=SMT
R2 R4 R6 R20 R21 R26 R27 R29 R31 R32 R33 R34: "Generic 0805 Resistor", Case-EIA=0805, Technology=SMT
R7 R8 R9 R10: library part CMP-017-0001-1, ComponentLink1Description=Digi-Key_Purchase_URL, ComponentLink1URL=https://www.digikey.com/en/products/detail/vishay-dale/SR32L500FE66/7560303?s=N4IgTCBcDaIM4CcDMYA2BWADJkBdAvkA, ComponentLink2Description=Datasheet_Link, ComponentLink2URL=https://www.vishay.com/docs/31067/sr.pdf, Design Item ID="Current Sensing resistor", Digi-Key_Part_Number=541-3933-ND, Source="CAN Termination Resistor 0805.SchLib"
R11 R12 R13 R14 R15 R16 R17 R18: library part CMP-006-0001-1, "Generic 0805 Resistor", Case-EIA=0805, Tolerance="5 %", Component Type=Standard, ComponentLink1Description=Digi-Key_Purchase_Link, ComponentLink1URL=https://www.digikey.com/product-detail/en/rohm-semiconductor/ESR10EZPJ121/RHM120KCT-ND/1762959, ComponentLink2Description="Datasheet Link", ComponentLink2URL=https://d1d2qsbl8m0m72.cloudfront.net/en/products/databook/datasheet/passive/resistor/chip_resistor/esr-e.pdf, Design Item ID="Resistor 0805", Pin Count=2, Technology=SMT
R22 R23 R24 R25 R28 R30 R36 R38: "Generic 0805 Resistor", Case-EIA=0805, Case-Metric=2012, Power="0.125 W", Tolerance="5 %", Technology=SMT
R35: library part CMP-006-0001-1, "Generic 0805 Resistor", Case-EIA=0805, Design Item ID="Resistor 0805", Pin Count=2, Technology=SMT
Reset: library part "Switch 6mm 24V (NO)", "FSM4JAH=6MM TACT SWITCH, HIGH TEMP", ComponentLink1Description=Digi-Key_Purchase_URL, ComponentLink1URL=https://www.digikey.com/en/products/detail/c-k/TDA04H0SB1/1083755, ComponentLink2Description="Datasheet Link", ComponentLink2URL=https://www.ckswitches.com/media/1328/tda.pdf, Digi-Key_Part_Number=CKN9065-ND, MF="TE Connectivity"
"Standard Header" "Standard Header1" "Standard Header2" "Standard Header3": "SQ Post Socket, Through-hole, Vertical, -55 to 125 degC, 2.54 mm Pitch, 16-Pin, Female, RoHS", Manufacturer=Samtec, PartNumber=SSQ-108-02-G-D, Temperature Range="-55 to 125 degC", ComponentLink1Description="Manufacturer URL", ComponentLink1URL=http://www.samtec.com, ComponentLink2Description=Datasheet, ComponentLink2URL=http://www.samtec.com/documents/webfiles/pdf/SSQ_TH.PDF, ComponentLink3Description="Package Specification", ComponentLink3URL=http://www.samtec.com/documents/webfiles/cpdf/SSQ-1XX-XX-XXX-X-XX-XXX-XX-X-MKT.pdf, DatasheetVersion=F-214, Mounting Technology=Through-hole, Orientation=Vertical, PackageDescription="Assembly, Socket Strip .025[0.64] SQ Tail", PackageReference=SSQ-108-02-X-D, PackageVersion="BD, 6/1987", Pitch="2.54 mm", RoHS=True
SW: library part "Dip Switch Array SMD Half-Pitch", "Ultra-Miniature Surface Mount Half-Pitch DIP Switch, 25 mA, 24 V, -40 to 85 degC, 8-Pin SMD, RoHS, Tube", Case\Package=DIP, Contact Current Rating="100 mA", Max Contact Resistance="100 mohm", Max Current Rating="25 mA", Max Operating Temperature="85 degC", Max Voltage Rating (DC)="24 V", Min Operating Temperature="-40 degC", Package Quantity=70, ComponentLink1Description="Datasheet Link", ComponentLink1URL=https://www.ckswitches.com/media/1328/tda.pdf, ComponentLink2Description=Digi-Key_Purchase_URL, ComponentLink2URL=https://www.digikey.com/en/products/detail/c-k/TDA04H0SB1/1083755, Contact Finish=Gold, Contact Material=Copper, Contact Plating=Gold, Current Rating="100 mA", DatasheetVersion=02/2016, Digi-Key_Part_Number=CKN9065-ND, Height="2.3 mm", Lead Pitch="1.27 mm", Length="6.21 mm", Mount="Surface Mount", Mounting Technology="Surface Mount", PackageDescription="8-Pin Surface Mount Device, Body 6.21 x 6.2 mm, Pitch 1.27 mm", PackageReference=TDA04H0SB1R, Packaging=Rail/Tube, Pins=4, Radiation Hardening=No, REACH SVHC="No SVHC", RoHSCompliant=true, Throw Configuration=SPST, Voltage Rating (DC)="24 V"
U1 U2 U3: library part CMP-0387-00547-2, "6 A Wide-Input Voltage Adjustable Switching Regulator, -40 to 85 degC, 7-pin Module (EUK7), Pb-Free (RoHS)", Manufacturer="Texas Instruments", ComponentLink1Description="Manufacturer URL", ComponentLink1URL=http://www.ti.com/, ComponentLink2Description=Datasheet, ComponentLink2URL=http://www.ti.com/general/docs/lit/getliterature.tsp?genericPartNumber=PTN78020W&fileType=pdf, ComponentLink3Description="Package Specification", ComponentLink3URL=http://www.ti.com/litv/pdf/mpds185, ComponentLink4Description="URL Link1", ComponentLink4URL="Samples URL:http://www.ti.com/product/ptn78020w#samples", DatasheetVersion=SLTS228C, Eco-Plan="Pb-Free (RoHS)", Iout(Max)(A)=6, Mounting Technology="Through Hole", PackageDescription="7-Pin Plastic Special Shape, Body 22.1 x 37.97 mm", PackageReference=EUK0007A, PackageVersion=4204986-2/C, PartNumber=PTN78020WAH, Regulated Outputs(#)=1, SubFamily="Non-Isolated POL", Vin(Max)(V)=36, Vin(Min)(V)=7, VO Adjustable=TRUE, Vout(Max)(V)=12.6, Vout(Min)(V)=2.5
U4: library part "Power Converter", "Switching Regulator 7-36Vin 5Vo 1.5A Non-Isolated DC-DC Converter, 5V dc Output, 1.5A", Manufacturer_Name="Murata Electronics", Manufacturer_Part_Number=OKI-78SR-5/1.5-W36H-C, Mouser Part Number=580-OKI78SR51.5W36HC, Datasheet Link=https://componentsearchengine.com/Datasheets/1/OKI-78SR-5_1.5-W36H-C.pdf
U5 U6 U7 U8: library part CMP-0704-00057-2, "High-Side Measurement, Bi-Directional Current / Power Monitor with I2C Interface, 2.7 to 5.5 V, -40 to 125 degC, 10-pin SOP (DGS10), Green (RoHS & no Sb/Br)", Quiescent Current (+/-)(Typ)(mA)=0.33, Rating=Catalog, CMRR(Min)(dB)=126, Code_JEDEC=MO-153, Common Mode Range(Max)(V)=36, Common Mode Range(Min)(V)=0, ComponentLink1Description="Manufacturer URL", ComponentLink1URL=http://www.ti.com/, ComponentLink2Description=Datasheet, ComponentLink2URL=http://www.ti.com/general/docs/lit/getliterature.tsp?genericPartNumber=INA226&fileType=pdf, ComponentLink3Description="Package Specification", ComponentLink3URL=http://www.ti.com/lit/ml/mpds035b/mpds035b.pdf, DatasheetVersion=SBOS547, Eco-Plan="Green (RoHS & no Sb/Br)", Gain(V/V)=1, Input Offset (+/-)(Max)(uV)=10, Input Offset Drift (+/-)(Max)(uV/Degrees Celsius)=0.1, Mounting Technology="Surface Mount", PackageDescription="10-Pin Plastic Small Outline, Body 3 x 3 mm, Pitch 0.5 mm", PackageReference=DGS0010A, PackageVersion="4073272/C, 02/2004", PartNumber=INA226AIDGST, Small-Signal Bandwidth(Typ)(MHz)=0.007, SubFamily="Current Shunt Monitor", Vs(Max)(V)=5.5, Vs(Min)(V)=2.7
U9: library part "PSOC MC", "64 pin psoc", ComponentLink1Description=Datasheet, ComponentLink1URL=https://www.cypress.com/file/222206/download, Part_Number=CY8C4248AZI-L485
U10: library part "CAN Tranceiver", "Microchip MCP2562-E/SN, CAN Transceiver 1MBps 1-channel IEC 61000-4-2, 8-Pin SOIC", Package="SO-8 Microchip", Availability=Unavailable, ComponentLink1Description=Digi-Key_Purchase_URL, ComponentLink1URL=https://www.digikey.com/en/products/detail/microchip-technology/MCP2562T-E-SN/5011025, ComponentLink2Description=Datasheet_Link, ComponentLink2URL=http://www.microchip.com/mymicrochip/filehandler.aspx?ddocname=en561044, Digi-Key_Part_Number=MCP2562T-E/SNCT-ND, MF=Microchip, MP=MCP2562-E/SN, Price=None, SnapEDA_Link=https://www.snapeda.com/parts/MCP2562-E/SN/Microchip/view-part/?ref=snap
Y1: library part Oscilator, "Standard Clock Oscillators", Arrow Part Number="SG-636PCW 50.0000MC3: ROHS", Manufacturer_Name="Epson Timing", ComponentLink1Description=Digi-Key_Purchase_URL, ComponentLink1URL=https://www.digikey.com/en/products/detail/epson/SG-636PTF-40.0000MC3-ROHS/1532628, ComponentLink2Description=Datasheet_Link, ComponentLink2URL=https://support.epson.biz/td/api/doc_check.php?dl=brief_SG-636PTF&lang=en, Digi-Key_Part_Number=SER3624CT-ND, Manufacturer_Part_Number="SG-636PCW 50.0000MC3: ROHS"

## Via types
v1: diameter 39.37, hole 19.68, Top Layer to Bottom Layer, 47 vias
v2: diameter 240, hole 126, Top Layer to Bottom Layer, 16 vias

## Nets (pads, with @x,y where several pads share a name; then routed paths per layer and width w, separated by ;. In a path a pad name is that pad's centre, name@x,y a point inside that pad or via, vN(x,y) a via of type N, cw(c..) or ccw(c..) an arc to the next point about the centre after c; other vN are vias at no path point)
3V3_Alert: U5.3 U9.15 | length 2028.4
  Bottom Layer w11: U9.15@9981.76,1301.57 10409.53,1301.57 10477.95,1370 10900,1370 10955,1425 10955,1720 11196.57,1961.57 11390.43,1961.57 11474.69,2045.82 U5.3@11474.69,2100.2
3V3_Converter_Enable: 3V3_Converter_Enable.1 R5.2 U9.43 | length 4011.9
  Bottom Layer w11: 3V3_Converter_Enable.1@5905,2100 5929.03,2124.03 5940,2135 8485,2135 8860,1760 9040,1760 9334.01,1465.99 9474.46,1465.99 9486.93,1478.46 9524.72,1478.46 U9.43@9525,1478.74
  Bottom Layer w15: 3V3_Converter_Enable.1@5905,2100 R5.2@5905,2195
3V3_Converter_Out: 3V3.1 C9.1 R7.1 R11.2 R30.1 U3.5 U3.6 | length 5155.4
  Mid Bottom Layer w100: U3.6@6744.25,1964.8 6909.06,1800 R7.1@11105,1800
  Bottom Layer w15: R30.1@10852.13,1325 10884.7,1325 10979.89,1420.19 10979.89,1674.89 R7.1@11105,1800 R11.2@11232.6,1800
3V3_Out: 3V3_1.2 3V3_2.2 "Standard Header1.2" "Standard Header2.2" "Standard Header3.2" "Standard Header.2" R7.2 R12.2 | length 4007.1
  Top Layer w50: R7.2@11705,1800 12068.51,1436.49 12068.51,580.82 12049.18,561.49 11958.51,561.49 11907.11,612.89 11907.11,622.89 11905,625
  Bottom Layer w15: R12.2@11630,1800 R7.2@11705,1800
  Bottom Layer w50: 3845,1625 4188.82,1625 3V3_1.2@4533.11,1969.29 ; 7540,1625 7999.25,1625 8232.13,1857.87 ; 3V3_2.2@8232.13,2000 8232.13,1857.87 ; 8737.89,1637.11 8635,1740 8350,1740 8232.13,1857.87
5V_Alert: U6.3 U9.16 | length 1608.2
  Bottom Layer w11: U9.16@9981.76,1281.89 10876.34,1281.89 10999.45,1405 11410.02,1405 11474.41,1469.39 U6.3@11474.41,1507.32
5V_Converter_Enable: 5V_Converter_Enable.1 R3.2 U9.18 | length 4060
  Bottom Layer w11: U9.18@9881.33,1201.15 9881.61,1201.43 9881.61,1239.22 9889.52,1247.13 10872.13,1247.13 11000,1375 13367.38,1375 13530,1212.38 13530,1105 5V_Converter_Enable.1@13560,1075
  Bottom Layer w15: R3.2@13560,975 5V_Converter_Enable.1@13560,1075
5V_Converter_Out: 5V.1 C6.1 R8.1 R13.2 R29.1 U2.5 U2.6 | length 2225.2
  Mid Bottom Layer w100: R8.1@11105,1210 11390,1495 12425,1495 U2.6@12710,1210
  Bottom Layer w15: R29.1@10852.13,1201.25 10860.88,1210 R8.1@11105,1210 R13.2@11232.6,1210
5V_Out: 5V_1.2 5V_2.2 5V_3.2 5V_4.2 "Standard Header1.1" "Standard Header2.1" "Standard Header3.1" "Standard Header.1" R8.2 R14.2 | length 945.7
  Bottom Layer w15: R14.2@11632.4,1210 R8.2@11705,1210
  Bottom Layer w50: R8.2@11705,1210 11705,735.18 11878.69,561.49 11941.49,561.49 12005,625
12V_Alert: U7.3 U9.19 | length 1772.3
  Bottom Layer w11: U9.19@9861.65,1201.15 9861.93,1200.87 9861.93,1163.08 9869.83,1155.17 11132.7,1155.17 11251.3,1036.58 11251.3,1033.83 11326.69,958.43 11464.6,958.43 11474.41,948.62 11474.41,917.88 U7.3@11474.68,917.6
12V_Converter_Enable: 12V_Converter_Enable.1 R1.2 U9.37 | length 3984.2
  Bottom Layer w11: 12V_Converter_Enable.1@5905,995 5932.79,1022.79 7379.96,1022.79 7427.76,975 9235,975 9430.78,1170.78 9430.78,1304.2 9486.93,1360.35 9524.72,1360.35 U9.37@9525,1360.63
  Bottom Layer w15: 12V_Converter_Enable.1@5905,995 R1.2@5905,1090
12V_Converter_Out: 12V.1 C3.1 R9.1 R15.2 R28.2 U1.5 U1.6 | length 5428
  Mid Bottom Layer w100: U1.6@6744.25,854.8 6959.55,639.5 12V.1@8439.3,639.5 8577.33,777.53 9399.07,777.53 9531.96,910.43 10814.57,910.43 R9.1@11105,620
  Bottom Layer w15: R28.2@10852.13,1112.5 10887.5,1112.5 11045,955 11045,680 R9.1@11105,620 R15.2@11232.6,620
12V_Out: 12V_2.2 12V_3.2 12V_4.2 12V_5.2 12V_6.2 F13.1 R9.2 R16.2 | length 72.6
  Bottom Layer w15: R16.2@11632.4,620 R9.2@11705,620
24V_Alert: U8.3 U9.29 | length 2403.5
  Bottom Layer w11: U9.29@9664.8,1201.15 9664.8,1125.2 9720,1070 10885,1070 11021,934 11021,635.41 11123.17,533.24 11184.59,533.24 11251.26,466.58 11251.26,463.83 11326.65,388.43 11462.2,388.43 11474.41,376.22 11474.41,345.48 U8.3@11474.69,345.2
24V_Out: 24V.1 24V_1.2 24V_2.2 24V_3.2 24V_4.2 "Standard Header1.5" "Standard Header1.7" "Standard Header1.9" "Standard Header1.11" "Standard Header1.13" "Standard Header1.15" "Standard Header2.5" "Standard Header2.7" "Standard Header2.9" "Standard Header2.11" "Standard Header2.13" "Standard Header2.15" "Standard Header3.5" "Standard Header3.7" "Standard Header3.9" "Standard Header3.11" "Standard Header3.13" "Standard Header3.15" "Standard Header.5" "Standard Header.7" "Standard Header.9" "Standard Header.11" "Standard Header.13" "Standard Header.15" R10.2 R18.2 | length 6208.9
  Top Layer w50: 7440,925 7440,1025 7440,1125 7440,1225 7440,1325 7440,1425 ; 8640,925 8640,1025 8640,1125 8640,1225 8640,1325 8640,1425
  Bottom Layer w15: R18.2@11634.17,90 11655.35,68.83 R10.2@11701.17,68.83
  Bottom Layer w50: 3745,1425 3745,1325 3745,1225 3745,1125 3745,1025 3745,925 4400.71,269.29 24V_2.2@4533.11,269.29 ; 7440,925 8095.71,269.29 24V_3.2@8228.11,269.29 8228.46,269.65 8449.65,269.65 24V.1@8450,270 8570,390 8570,855 8640,925 ; R10.2@11705,65 11911.37,65 12068.51,222.14 12068.51,758.51 12005,822.02 12005,825 12005,925 12005,1025 12005,1125 12005,1225 12005,1325